# Altium PCB PCB1.PcbDoc
Units mm, origin at the board's own origin, x right, y up, seen from the top; angles counter-clockwise.
Board outline 19 x 36 mm, 2 copper layers (Top Layer, Bottom Layer); 8 components, 16 nets, 63 pads, 4 vias.
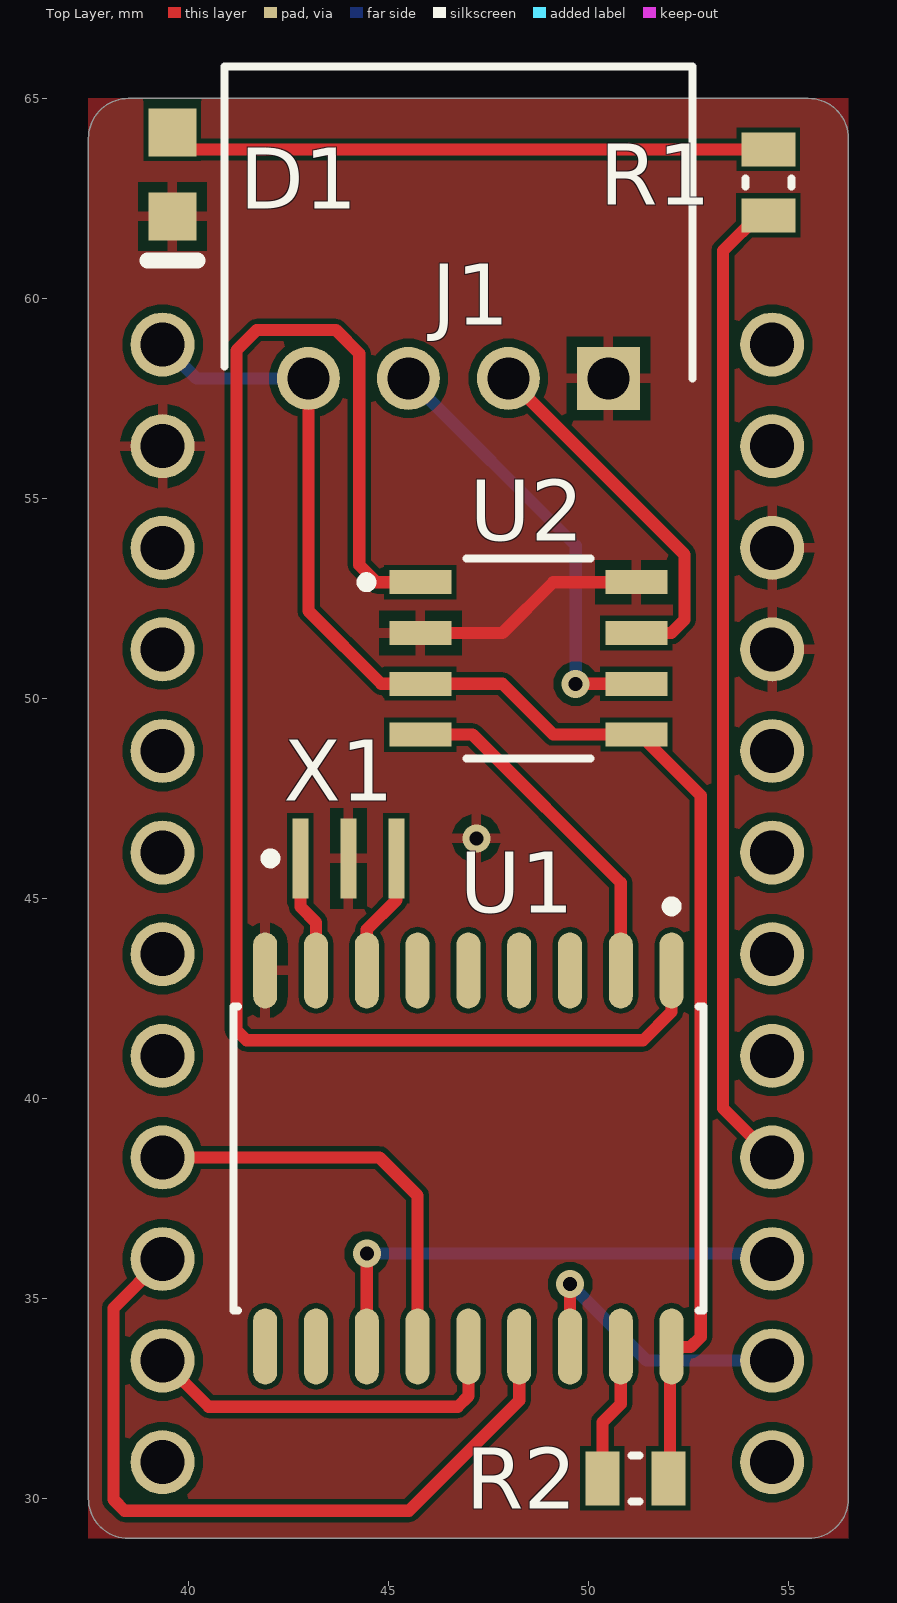
[diagram p0: Top Layer view]
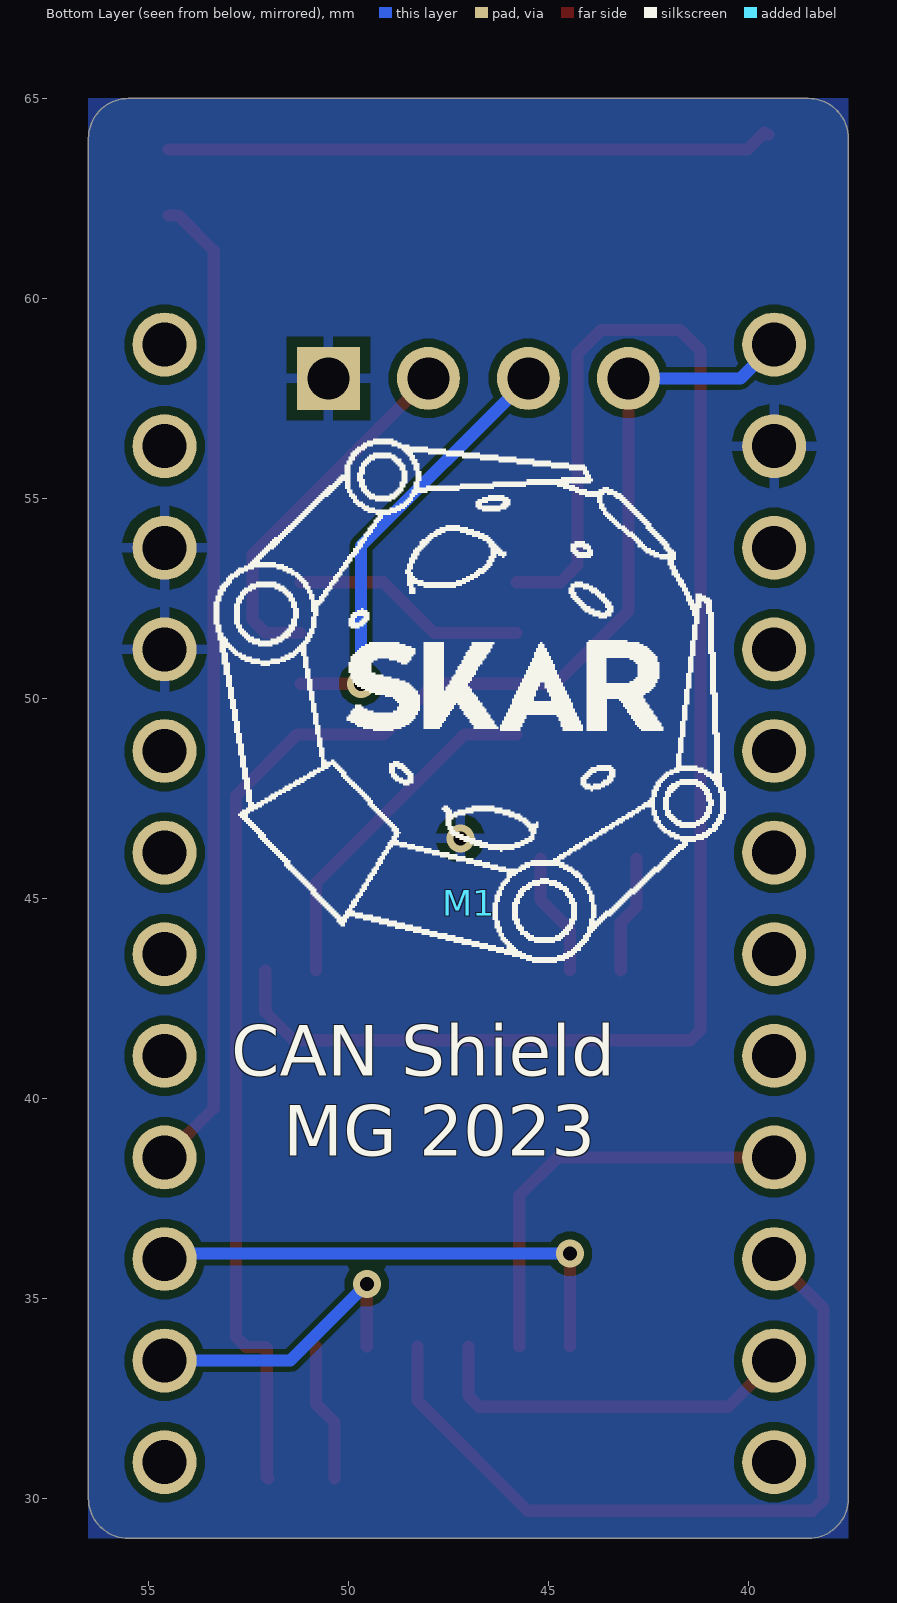
[diagram p1: Bottom Layer view, seen from below]
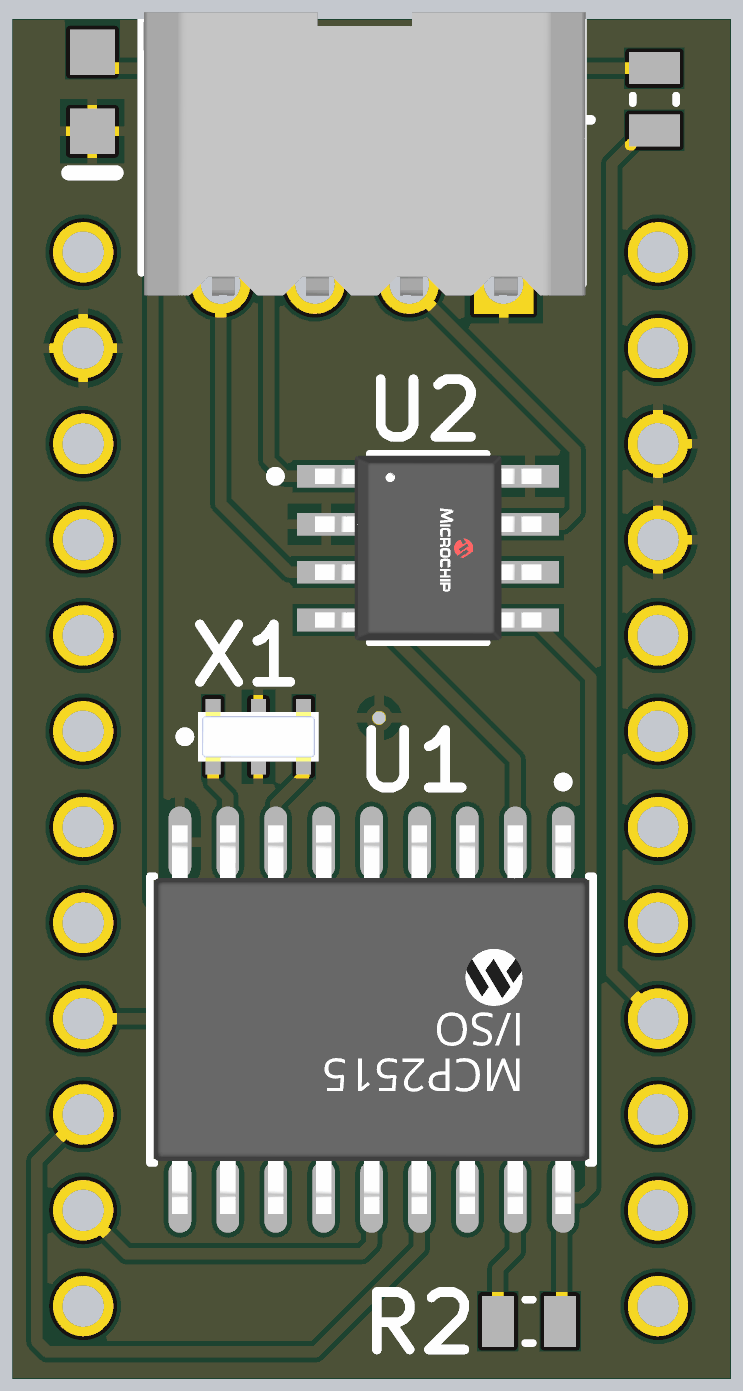
[diagram p2: 3D render of the assembled board from above, using the file's embedded part models]

## Layer stack, top to bottom
Top Solder: solder mask 0.0102, Solder Resist, Dk 3.5
Top Layer: signal copper 0.0356
Dielectric 1: dielectric 0.32, FR-4, Dk 4.8
Bottom Layer: signal copper 0.0356
Bottom Solder: solder mask 0.0102, Solder Resist, Dk 3.5

## Board outline
37.5,29.998 37.5,64.002 37.5,64 cw(c38.5,64) 38.5,65 55.5,65 cw(c55.5,64) 56.5,64 56.5,64.002 56.5,29.998 56.5,30 cw(c55.5,30) 55.5,29 38.5,29 cw(c38.5,30)

## Design rules (kind name [scope] priority, off if disabled: settings)
Clearance [All] p1: gap=0.127 ignorepadtopadclearanceinfootprint=FALSE except(0: SMDPad-Hole THPad-Hole Via-Hole Fill-Hole Poly-Hole Region-Hole Text-Hole; 0.1: Arc-Arc Arc-Track Track-Track; 0.2: Arc-SMDPad Track-SMDPad THPad-Fill THPad-Poly THPad-Region Via-Fill Via-Poly Via-Region; 0.254: Arc-Via Arc-Text Arc-Hole Track-Via Track-Text Track-Hole SMDPad-THPad SMDPad-Via SMDPad-Text THPad-Via THPad-Text Via-Via Via-Text Fill-Text Poly-Text Region-Text Text-Text; 0.5: THPad-THPad)
PolygonConnect [All] p1: connectstyle=Relief reliefconductorwidth=0.254 reliefentries=4 polygonreliefangle="90 Angle" airgapwidth=0.254
RoutingVias [All] p1: holewidth=0.35 width=0.7 viastyle="Through Hole" minholewidth=0.35 minwidth=0.7 maxholewidth=0.35 maxwidth=0.7
SolderMaskExpansion [All] p1: expansion=0.102 istentingtop=FALSE
Width [All] p1: maxlimit=0.381 minlimit=0.203 preferedwidth=0.305 minimp=50.000000 maximp=50.000000 favimp=50.000000
30 further rules are at their usual default settings.

## Components (designator, comment, footprint, x,y, rotation, side; value= is the part's Value field where it differs from the comment)
D1 "HSMG-C170" AVAG-HSMX-C170_V 39.6,63.1 r270 top (schematic designator DS1)
J1 "1778641" SHDRRA4W60P0X250_1X4_1170X750X510P 50.5,58 r0 top
M1 "Arduino + CAN" PCBComponent_1 47,47 r180 bottom locked
R1 "10K" RESC2013X50X30LL20T20 54.5,62.9 r90 top
R2 "10K" RESC2013X50X30LL20T20 51.175,30.5 r0 top
U1 "MCP2515-I/SO" FP-C04-051-MFG 47,38.5 r270 top
U2 "MCP2561FDT-E/SN" FP-C04-057-SN-MFG 48.5,51 r0 top
X1 "CSTCE8M00G55-R0" MURA-CSTCE_G_A-3_V 44,46 r0 top

## Footprints (in the part's own frame and the unit in brackets; to place one, negate y for a bottom-side part, rotate by r counter-clockwise, add the part's x,y. Pads: shape width x height; smd on the part's side, far side on the other; paste and mask are expansions set on the pad)
AVAG-HSMX-C170_V [mm] "SMD, 2-Leads, Body 2x1.25mm, Height 0.8mm"
  rect 1.2x1.2 smd: 1(-1.05,0) 2(1.05,0)
  silkscreen extent 2.15,-0.62 2.15,0.62, body extent -1,-0.63 1,0.63, height 0.8
FP-C04-051-MFG [mm]
  rrect100% 1.9x0.6 smd paste+0 mask+0: 1(-4.7,5.08) 2(-4.7,3.81) 3(-4.7,2.54) 4(-4.7,1.27) 5(-4.7,0) 6(-4.7,-1.27) 7(-4.7,-2.54) 8(-4.7,-3.81) 9(-4.7,-5.08) 10(4.7,-5.08) 11(4.7,-3.81) 12(4.7,-2.54) 13(4.7,-1.27) 14(4.7,0) 15(4.7,1.27) 16(4.7,2.54) 17(4.7,3.81) 18(4.7,5.08)
  silkscreen extent -6.42,-5.88 3.8,5.87, body extent -5.75,-6.12 5.75,6.12, height 0.25
FP-C04-057-SN-MFG [mm]
  rect 1.55x0.6 smd paste+0 mask+0: 1(-2.7,1.905) 2(-2.7,0.635) 3(-2.7,-0.635) 4(-2.7,-1.905) 5(2.7,-1.905) 6(2.7,-0.635) 7(2.7,0.635) 8(2.7,1.905)
  silkscreen extent -4.17,-2.5 1.55,2.5, body extent -3.57,-2.75 3.57,2.75, height 0.25
MURA-CSTCE_G_A-3_V [mm] "SMD, 3-Leads, Body 3.2x1.3mm, Pitch 1.2mm"
  rect 0.4x2 smd: 1(-1.2,0) 2(0,0) 3(1.2,0)
  silkscreen extent -2.07,-0.12 -1.83,0.12, body extent -1.6,-0.65 1.6,0.65, height 0.7
PCBComponent_1 [mm]
  round 1.6 hole 1.1 paste-2539.97: 1(-7.595,11.845) 2(-7.595,9.305) 3(-7.595,6.765) 4(-7.595,4.225) 5(-7.595,1.685) 6(-7.595,-0.855) 7(-7.595,-3.395) 8(-7.595,-5.935) 9(-7.595,-8.475) 10(-7.595,-11.015) 11(-7.595,-13.555) 12(-7.595,-16.095) 13(7.645,-16.095) 14(7.645,-13.555) 15(7.645,-11.015) 16(7.645,-8.475) 17(7.645,-5.935) 18(7.645,-3.395) 19(7.645,-0.855) 20(7.645,1.685) 21(7.645,4.225) 22(7.645,6.765) 23(7.645,9.305) 24(7.645,11.845)
RESC2013X50X30LL20T20 [mm] "Chip Resistor, 2-Leads, Body 2.00x1.25mm, IPC High Density"
  rect 0.85x1.35 smd: 1(-0.825,0) 2(0.825,0)
  silkscreen extent -0.1,-0.57 0.1,0.58, body extent -1.1,-0.72 1.1,0.72, height 0.5
SHDRRA4W60P0X250_1X4_1170X750X510P [mm]
  rect 1.575x1.575 / inner round 1.575 / far side rect 1.575x1.575 hole 1.05: 1(0,0)
  round 1.575 hole 1.05: 2(-2.5,0) 3(-5,0) 4(-7.5,0)
  silkscreen extent -9.6,0 2.1,7.8, body extent -9.55,-0.3 2.17,7.2, height 5.02

## Part data
D1: library part CMP-2000-05062-1, "Chip LED, Green, 2.2 V, -40 to 85 degC, 2-Pin SMD, Pb-Free, Tape and Reel", Forward Current If=20mA, Forward Voltage=2.2V, Forward Voltage VF Max=2.6V, LED Colour=Green, Manufacturer=Avago, Operating Temperature Max=85degC, Operating Temperature Min=-30degC, Operating Temperature Range=-30degCto+85degC, Opto Case Style=SMD, Package Description="2-Pin Surface Mount Device, Body 2 x 1.25 mm, Height 0.8 mm", Package Reference=HSMX-C170, Storage Temperature Min=-40degC, Bulb Size=1.25mmx1.4mm, Datasheet URL=https://datasheet.ciiva.com/29280/180495-da-01-en-chip-led-hsmg-c170-gelb-gruen-29280971.pdf, Datasheet Version=Oct-08, Dominant Wavelength=572nm, Dominant Wavelength Typ=572nm, External Depth=0.8mm, External Length / Height=2mm, External Width=1.25mm, Forward Current If Max=20mA, LED Mounting=SMD, LED Type=Standard, Lens Shape=Rectangular, Light Area Height=1mm, Luminous Intensity=15mcd, Luminous Intensity Min=4mcd, Luminous Intensity Typ=15mcd, Manufacturer URL=http://www.avagotech.com/, Mounting Type=SMD, MSL=MSL2A-4weeks, No. of Pins=2, Opto Mounting Orientation=Top, Packaging=CutTape, Peak Forward Current=20mA, Peak Wavelength=570nm, PIV Max=5V, Storage Temperature Max=85degC, SVHC=NoSVHC(16-Jun-2014), Viewing Angle=170deg, Voltage Vf Typ=2.2V, Wavelength Typ=570nm
J1: "PCB header, nominal cross section: 0.5 mm?, color: black, nominal current: 6 A, rated voltage (III/2): 160 V, contact surface: Tin, type of contact: Male connector, Number of potentials: 4, Number of rows: 1, Number of positions per row: 4, number of connections: 4, product range: PTSM 0,5/..-HH-THR, pitch: 2.5 mm, mounting: THR soldering, pin layout: Linear pinning, solder pin [P]: 2.1 mm, Stecksystem: COMBICON COMPACT PTSM, Locking: without, type of packaging: 32 mm wide tape", Manufacturer_Name="Phoenix Contact", Mouser Part Number=651-1778641, Arrow Part Number=1778641, Arrow Price/Stock=https://www.arrow.com/en/products/1778641/phoenix-contact?region=nac, Datasheet Link=http://www.phoenixcontact.com/de/produkte/1778641/pdf, Geometry.Height=5.1mm, Manufacturer_Part_Number=1778641, Mouser Price/Stock=https://www.mouser.co.uk/ProductDetail/Phoenix-Contact/1778641?qs=i0qWf6NAoDs%252BwkQoFV1ycQ%3D%3D
M1: library part Arduino, "Arduino Pro Micro + CAN Shield"
R1 R2: library part CMP-2001-04896-1, Manufacturer="Vishay Dale", Part Number=CRCW08050000Z0EA
U1: library part CMP-0186-00133-3, "IC CAN CONTROLLER W/SPI 18SOIC", Ambient Temperature Range High=+125°C, Ambient Temperature Range Low=-65°C, Manufacturer=Microchip, Max Supply Voltage=5.5V, Min Supply Voltage=2.7V, Nominal Supply Current=10mA, Package=C04-051, Temperature="-40°C to +85°C", Temperature Range High=+85°C, Temperature Range Low=-40°C, Automotive=No, Category=IC, ComponentLink2Description=Datasheet, ComponentLink2URL=http://ww1.microchip.com/downloads/en/DeviceDoc/MCP2515-Stand-Alone-CAN-Controller-with-SPI-20001801J.pdf, Device Class L1="Integrated Circuits (ICs)", Device Class L2="Interface ICs", Device Class L3=Controllers, Digikey Description="IC CAN CONTROLLER W/SPI 18SOIC", Footprint Url=http://ww1.microchip.com/downloads/en/DeviceDoc/18L_SOIC_Wide_7.50_SO_C04-0051D.pdf, Function=Controller, Height=2.65mm, Interface=SPI,CAN, Ipc Land Pattern Name=SOIC127P1030X265-18, Lead Free=Yes, Manufacturer Part Number=MCP2515-I/SO, Mouser Description="CAN Interface IC W/ SPI Interface", Octopart=https://octopart.com/mcp2515-i%2Fso-microchip-430187, RoHS=TRUE, Standoff Height=0.1mm
U2: library part CMP-06279-000064-1, "IC TRANSCEIVER 1/1 8SOIC", Case/Package=SOIC, Max Operating Temperature=125°C, Max Supply Voltage=5.5V, Min Operating Temperature=-40°C, Min Supply Voltage=4.5V, Operating Supply Current=70mA, Package Quantity=3300, Data Rate=8Mbps, Mount="Surface Mount", Number of Pins=8, Number of Transceivers=1, Packaging="Tape and Reel", Receiver Hysteresis=200mV, RoHS Compliant=Yes, Series=-, Weight=0.019048oz
X1: library part CMP-2100-03620-1, "Ceramic Resonator, 8 MHz, +/- 0.5%, -20 to 80 degC, 3-Pin SMD, RoHS, Tape and Reel", Capacitance=33pF, Case/Package=Ceramic, Frequency=8MHz, Frequency Stability=0.2%, Frequency Tolerance=0.5%, Manufacturer=Murata, Max Operating Temperature=80degC, Min Operating Temperature=-20degC, Package Description="3-Pin Surface Mount Device, Body 3.2 x 1.3 mm, Pitch 1.2 mm", Package Quantity=1, Package Reference=CSTCE_G_A-3, Composition=Ceramic, Contact Plating=Gold, Datasheet URL=http://www.murata.com/~/media/webrenewal/support/library/catalog/products/timingdevice/ceralock/p16e.ashx, Datasheet Version=42339.0, Height=0.031inch, Lead Free=LeadFree, Length=0.126inch, Load Capacitance=33pF, Manufacturer URL=http://www.murata.com/, Mount=SurfaceMount, Number of Pins=3, Packaging=TapeandReel, REACH SVHC=NoSVHC, RoHSCompliant=True, Self Resonant Frequency=8MHz, Termination=SMD/SMT, Tolerance=0.5%, Width=0.051inch

## Via types
v1: diameter 0.7, hole 0.35, Top Layer to Bottom Layer, tented both sides, 4 vias

## Nets (pads, with @x,y where several pads share a name; then routed paths per layer and width w, separated by ;. In a path a pad name is that pad's centre, name@x,y a point inside that pad or via, vN(x,y) a via of type N, cw(c..) or ccw(c..) an arc to the next point about the centre after c; other vN are vias at no path point)
+5: J1.4 M1.24 R2.2 U1.18 U2.3 U2.5 | length 39.2
  Top Layer w0.305: J1.4 43,52.188 44.823,50.365 U2.3 47.854,50.365 49.124,49.095 U2.5 51.283,49.095 52.807,47.571 52.807,34.036 52.553,33.782 52.08,33.782 52.04,33.742 52.04,30.54 R2.2
  Bottom Layer w0.305: M1.24 40.2,58 J1.4
CS: M1.11 U1.16 | length 7.4
  Top Layer w0.305: U1.16 v1(49.54,35.357)
  Bottom Layer w0.305: v1(49.54,35.357) 51.452,33.445 M1.11
GND: D1.2 J1.1 M1.3 M1.4 M1.23 U1.9 U2.2 U2.8 X1.2 | length 5.9
  Top Layer w0.305: U2.2 47.854,51.635 49.124,52.905 U2.8
  other v1: 47.2,46.5
INT: M1.10 U1.12 | length 12.5
  Top Layer w0.305: U1.12 v1(44.46,36.119)
  Bottom Layer w0.305: v1(44.46,36.119) 54.461,36.119 M1.10
MISO: M1.15 U1.15 | length 19.3
  Top Layer w0.305: M1.15 38.125,34.755 38.125,29.972 38.405,29.693 45.517,29.693 48.27,32.446 U1.15
MOSI: M1.14 U1.14 | length 9.5
  Top Layer w0.305: M1.14 40.507,32.293 46.736,32.293 47,32.557 U1.14
NetD1_1: D1.1 R1.2 | length 15.2
  Top Layer w0.305: D1.1@39.5,64.1 D1.1@39.6,64.1 ; D1.1 40.025,63.725 R1.2
NetJ1_2: J1.2 U2.7 | length 9.2
  Top Layer w0.305: J1.2 52.4,53.6 52.4,51.965 52.07,51.635 U2.7
NetJ1_3: J1.3 U2.6 | length 10.9
  Top Layer w0.305: v1(49.682,50.365) U2.6
  Bottom Layer w0.305: J1.3 49.682,53.818 v1(49.682,50.365)
NetM1_9: M1.9 R1.1 | length 24.7
  Top Layer w0.305: R1.1 54.25,62.075 53.365,61.19 53.365,39.755 M1.9
NetR2_1: R2.1 U1.17 | length 3.5
  Top Layer w0.305: R2.1 50.35,31.902 50.81,32.362 U1.17
NetU1_1: U1.1 U2.1 | length 39.8
  Top Layer w0.305: U2.1 44.704,52.905 44.272,53.337 44.272,58.623 43.688,59.207 41.707,59.207 41.199,58.699 41.199,41.707 41.453,41.453 51.369,41.453 52.08,42.164 U1.1
NetU1_2: U1.2 U2.4 | length 8.7
  Top Layer w0.305: U2.4 47.105,49.095 50.81,45.39 U1.2
NetU1_7: U1.7 X1.3 | length 3.1
  Top Layer w0.305: U1.7 44.46,44.221 45.2,44.961 X1.3
NetU1_8: U1.8 X1.1 | length 3
  Top Layer w0.305: X1.1 42.8,44.789 43.19,44.399 U1.8
SCK: M1.16 U1.13 | length 10.5
  Top Layer w0.305: M1.16 44.775,38.525 45.73,37.57 U1.13
pads on no net: M1.1 M1.2 M1.5 M1.6 M1.7 M1.8 M1.12 M1.13 M1.17 M1.18 M1.19 M1.20 M1.21 M1.22 U1.3 U1.4 U1.5 U1.6 U1.10 U1.11

## Polygon pours and split planes (outlines as drawn)
GND on Bottom Layer "GND_L02_P001" (solid, pour order 1): 56.5,65 37.5,65 37.5,29 56.5,29
GND on Top Layer "GND_L01_P000" (solid, pour order 0): 37.5,65 37.5,29 56.5,29 56.5,65

## Silkscreen, mask and mechanical layers (free items; w line width, h text height)
Bottom Overlay:
  drawing of 17 lines, arcs and shapes, not listed
  text "CAN Shield" at 52.925,40.565 h1.27
  text "MG 2023" at 51.632,38.565 h1.27
Mechanical 1:
  lines w0.254: 37.5,29.998 37.5,64.002 ; 37.5,30 ccw(c38.5,30) 38.5,29 55.5,29 ccw(c55.5,30) 56.5,30 ; 37.5,64 cw(c38.5,64) 38.5,65 55.5,65 cw(c55.5,64) 56.5,64 ; 56.5,29.998 56.5,64.002